# Altium PCB thesis.PcbDoc
Units mil, origin at the board's own origin, x right, y up, seen from the top; angles counter-clockwise.
Board outline 3149.61 x 3149.61 mil, 2 copper layers (Top Layer, Bottom Layer); 73 components, 69 nets, 268 pads, 192 vias.
Unrouted connection lines stored in the file: 133.
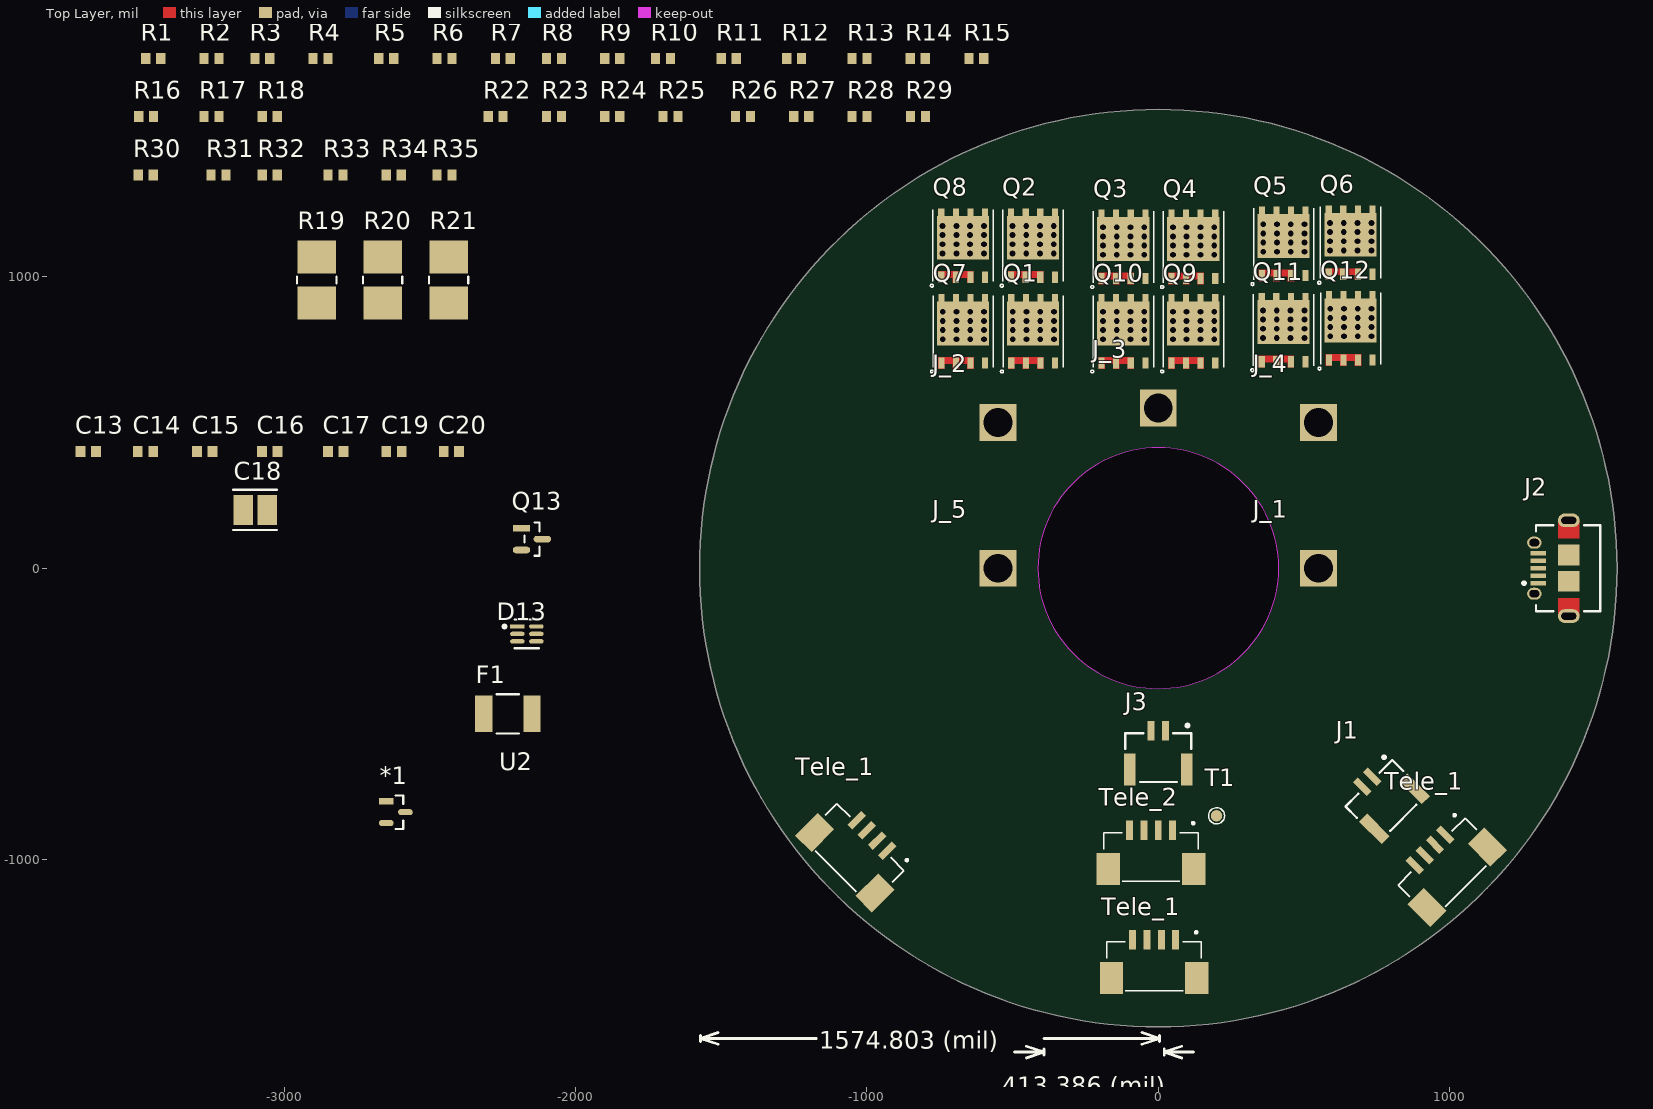
[diagram p0: Top Layer view]
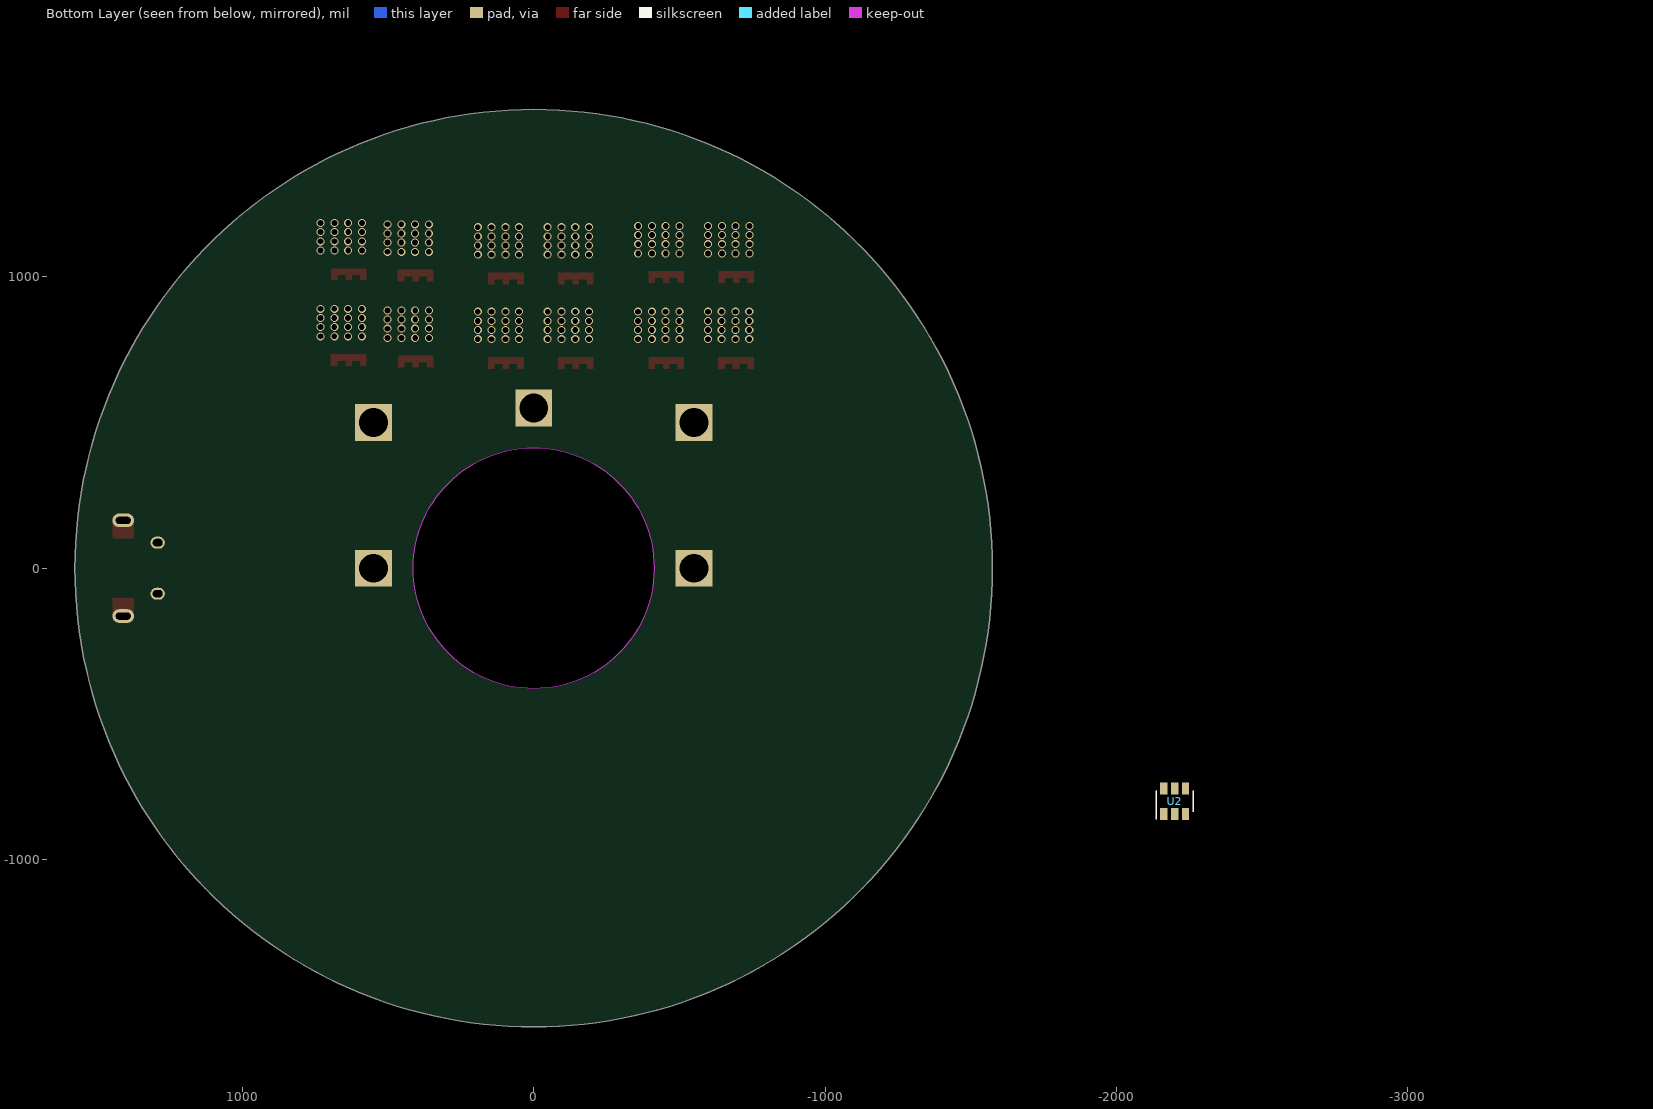
[diagram p1: Bottom Layer view, seen from below]

## Layer stack, top to bottom
Top Solder: solder mask 0.4, Solder Resist, Dk 3.5
Top Layer: signal copper 1.4
Dielectric 1: dielectric 12.6, FR-4, Dk 4.8
Bottom Layer: signal copper 1.4
Bottom Solder: solder mask 0.4, Solder Resist, Dk 3.5

## Board outline
-1574.8,0 ccw(c0,0) 0,-1574.8 ccw(c0,0) 1574.8,0 ccw(c0,0) 0,1574.8 ccw(c0,0)
cut-out: -413.39,0 ccw(c0,0) 0,-413.39 ccw(c0,0) 413.39,0 ccw(c0,0) 0,413.39 ccw(c0,0)

## Design rules (kind name [scope] priority, off if disabled: settings)
Clearance [All] p1: gap=10 ignorepadtopadclearanceinfootprint=FALSE except(0: Arc-Hole Track-Hole SMDPad-Hole THPad-Hole Via-Hole Fill-Hole Poly-Hole Region-Hole Text-Hole)
PolygonConnect [All] p1: connectstyle=Relief reliefconductorwidth=10 reliefentries=4 polygonreliefangle="90 Angle" airgapwidth=10
RoutingVias [All] p1: holewidth=28 width=50 viastyle="Through Hole" minholewidth=28 minwidth=50 maxholewidth=28 maxwidth=50
SolderMaskExpansion [All] p1: expansion=4 istentingtop=FALSE
Width [All] p1: maxlimit=10 minlimit=10 preferedwidth=10
30 further rules are at their usual default settings.

## Components (designator, comment, footprint, x,y, rotation, side; value= is the part's Value field where it differs from the comment)
*1 "TMP235AEDBZRQ1_1" TMP235AEDBZRQ1 -2617.11,-837.4 r0 top
C13 "Cap_0603" CAP_0603 -3673.43,400 r180 top
C14 "Cap_0603" CAP_0603 -3476.57,400 r180 top
C15 "Cap_0603" CAP_0603 -3273.43,400 r180 top
C16 "Cap_0603" CAP_0603 -3050,400 r180 top
C17 "Cap_0603" CAP_0603 -2823.43,400 r180 top
C18 "100n" Cap_1210 -3100,200 r0 top
C19 "Cap_0603" CAP_0603 -2623.43,400 r180 top
C20 "Cap_0603" CAP_0603 -2426.57,400 r180 top
D13 "BAV99S,115" BAV99S -2167.45,-225.59 r0 top
F1 "Polyfuse" Polyfuse -2232.68,-500 r0 top value=0.4-6.5Ω
J1 "JST-GH-2" JST-GH-2 782.12,-797.33 r45 top
J2 "USB_micro" USB_micro 1350,0 r90 top
J3 "JST-GH-2" JST-GH-2 0,-650 r0 top
J_1 "Connector" Conn_01x01 550,0 r0 top
J_2 "Connector" Conn_01x01 -550,500 r0 top
J_3 "Connector" Conn_01x01 0,550 r0 top
J_4 "Connector" Conn_01x01 550,500 r0 top
J_5 "Connector" Conn_01x01 -550,0 r0 top
Q1 "BSC021N08NS5ATMA1" BSC021N08NS5ATMA1 -429.5,815.48 r0 top
Q2 "BSC021N08NS5ATMA1" BSC021N08NS5ATMA1 -430,1110 r0 top
Q3 "BSC021N08NS5ATMA1" BSC021N08NS5ATMA1 -119.5,1105.48 r0 top
Q4 "BSC021N08NS5ATMA1" BSC021N08NS5ATMA1 120.5,1105.48 r0 top
Q5 "BSC021N08NS5ATMA1" BSC021N08NS5ATMA1 430.5,1115.48 r0 top
Q6 "BSC021N08NS5ATMA1" BSC021N08NS5ATMA1 660,1120 r0 top
Q7 "BSC021N08NS5ATMA1" BSC021N08NS5ATMA1 -669.5,815.48 r0 top
Q8 "BSC021N08NS5ATMA1" BSC021N08NS5ATMA1 -670,1110 r0 top
Q9 "BSC021N08NS5ATMA1" BSC021N08NS5ATMA1 120.5,815.48 r0 top
Q10 "BSC021N08NS5ATMA1" BSC021N08NS5ATMA1 -119.5,815.48 r0 top
Q11 "BSC021N08NS5ATMA1" BSC021N08NS5ATMA1 430,820 r0 top
Q12 "BSC021N08NS5ATMA1" BSC021N08NS5ATMA1 660.5,825.48 r0 top
Q13 "BSS138" BSS138 -2150,100 r0 top
R1 "RES_0603" Res_0603 -3450,1750 r0 top
R2 "RES_0603" Res_0603 -3250,1750 r0 top
R3 "RES_0603" Res_0603 -3075.59,1750 r0 top
R4 "RES_0603" Res_0603 -2875.59,1750 r0 top
R5 "RES_0603" Res_0603 -2650,1750 r0 top
R6 "RES_0603" Res_0603 -2450,1750 r0 top
R7 "RES_0603" Res_0603 -2250,1750 r0 top
R8 "RES_0603" Res_0603 -2074.41,1750 r0 top
R9 "RES_0603" Res_0603 -1874.41,1750 r0 top
R10 "RES_0603" Res_0603 -1700,1750 r180 top
R11 "RES_0603" Res_0603 -1474.41,1750 r0 top
R12 "RES_0603" Res_0603 -1250,1750 r180 top
R13 "RES_0603" Res_0603 -1025.59,1750 r180 top
R14 "RES_0603" Res_0603 -825.59,1750 r180 top
R15 "RES_0603" Res_0603 -624.41,1750 r180 top
R16 "RES_0603" Res_0603 -3474.41,1550 r180 top
R17 "RES_0603" Res_0603 -3250,1550 r180 top
R18 "RES_0603" Res_0603 -3050,1550 r180 top
R19 "WSLP25122L000FEA" Shunt_res -2888.69,989.21 r90 top
R20 "WSLP25122L000FEA" Shunt_res -2662.31,989.21 r90 top
R21 "WSLP25122L000FEA" Shunt_res -2435.94,989.21 r90 top
R22 "RES_0603" Res_0603 -2274.41,1550 r180 top
R23 "RES_0603" Res_0603 -2074.41,1550 r180 top
R24 "RES_0603" Res_0603 -1874.41,1550 r180 top
R25 "1k" Res_0603 -1674.41,1550 r180 top
R26 "RES_0603" Res_0603 -1425.59,1550 r180 top
R27 "RES_0603" Res_0603 -1225.59,1550 r180 top
R28 "RES_0603" Res_0603 -1025.59,1550 r180 top
R29 "RES_0603" Res_0603 -824.41,1550 r180 top
R30 "RES_0603" Res_0603 -3475.59,1350 r180 top
R31 "RES_0603" Res_0603 -3225.59,1350 r0 top
R32 "RES_0603" Res_0603 -3050,1350 r180 top
R33 "RES_0603" Res_0603 -2824.41,1350 r180 top
R34 "RES_0603" Res_0603 -2624.41,1350 r180 top
R35 "RES_0603" Res_0603 -2450,1350 r180 top
T1 "TestPoint" Testpoint 200,-850 r0 top
Tele_1 "JST-GH-4" JST-GH-4 -1025.75,-1122.01 r135 top
Tele_1 "JST-GH-4" JST-GH-4 100,-1450 r180 top
Tele_1 "JST-GH-4" JST-GH-4 1137.22,-1010.55 r225 top
Tele_2 "JST-GH-4" JST-GH-4 89.57,-1075.2 r180 top
U2 "MAX4995A" MAX4995AAUT+T -2200,-800 r0 top

## Footprints (in the part's own frame and the unit in brackets; to place one, negate y for a bottom-side part, rotate by r counter-clockwise, add the part's x,y. Pads: shape width x height; smd on the part's side, far side on the other; paste and mask are expansions set on the pad)
BAV99S [mm]
  rect 1.259x0.382 smd paste+0 mask+0: 1(-0.827,0.65)
  rrect100% 1.259x0.382 smd paste+0 mask+0: 2(-0.827,0) 3(-0.827,-0.65) 4(0.827,-0.65) 5(0.827,0) 6(0.827,0.65)
  silkscreen extent -2.08,-1.25 1.05,1.25, body extent -1.71,-1.25 1.71,1.25, height 0.25
BSC021N08NS5ATMA1 [mil] "Mosfet_esc"
  rect 21x39 smd mask+0: 1(-75,-110.93) 1(-25,-110.93) 1(25,-110.94) 4(75,-110.93)
  rect 21x29 smd mask+0: 8(-75,110.94) 8(-25,110.94) 8(25,110.94) 8(75,110.94)
  rect 179.13x150.64 smd mask+0: 8(-0.5,24.52)
  Top Layer region: 35.5,-91.43 35.5,-130.43 14.5,-130.43 14.5,-113.09 -14.5,-113.09 -14.5,-130.43 -35.5,-130.43 -35.5,-113.09 -64.5,-113.08 -64.5,-130.43 -85.5,-130.43 -85.5,-91.44
  silkscreen extent -112,-145 104,121, body extent -105,-121 105,121, height 39
BSS138 [mm]
  rect 1.524x0.578 smd paste+0 mask+0: 1(-0.91,0.95)
  rrect100% 1.524x0.578 smd paste+0 mask+0: 2(-0.91,-0.95) 3(0.91,0)
  silkscreen extent -0.65,-1.45 0.65,1.45, body extent -1.92,-1.7 1.92,1.7, height 0.25
CAP_0603 [mm]
  rect 0.85x0.95 smd: 1(-0.675,0) 2(0.675,0)
  body extent -0.85,-0.45 0.85,0.45, height 0.9
Cap_1210 [mil]
  rect 67.04x102.61 smd paste+0 mask+0: 1(-41.36,0) 2(41.36,0)
  silkscreen extent -75,-69 75,69, body extent -79,-57 79,57, height 10
Conn_01x01 [mm]
  rect 3.2x3.2 hole 2.5 paste-3.2 mask+0: 1(0,0) 1(0,0)
JST-GH-2 [mm] "FP-BM02B-GHS-TBT_LF_SN-MFG"
  rect 0.6x1.7 smd paste+0 mask+0: 1(0.625,2.325) 2(-0.625,2.325)
  rect 1x2.8 smd paste+0 mask+0: 3(-2.475,-1.025) 4(2.475,-1.025)
  silkscreen extent -2.88,-2.12 2.88,2.92, body extent -3.07,-2.52 3.07,3.28, height 0.25
JST-GH-4 [mm]
  rect 0.6x1.7 smd: 1(1.025,-4.45) 2(2.275,-4.45) 3(3.525,-4.45) 4(4.775,-4.45)
  rect 2.032x2.8 smd: S1(6.625,-1.1) S2(-0.825,-1.1)
  silkscreen extent -1.23,-5.18 7.02,0, body extent -1.24,-4.67 7.01,0.23, height 4.06
MAX4995AAUT+T [mm]
  rect 0.65x1.06 smd far side mask+0: 1(0.95,-1.1) 2(0,-1.1) 3(-0.95,-1.1) 4(-0.95,1.1) 5(0,1.1) 6(0.95,1.1)
  body extent -1.5,-1.5 1.5,1.5, height 1.45
Polyfuse [mm]
  rect 1.5x3.2 smd paste+0 mask+0: 1(-2.1,0) 2(2.1,0)
  silkscreen extent -0.97,-1.71 0.97,1.71, body extent -2.95,-1.81 2.95,1.81, height 0.25
Res_0603 [mm]
  rect 0.8x0.95 smd: 1(-0.65,0) 2(0.65,0)
  body extent -0.82,-0.48 0.82,0.48, height 0.5
Shunt_res [mil]
  rect 113.07x131.45 smd paste+0 mask+0: 1(-79.47,0) 2(79.47,0)
  silkscreen extent -11,-68 11,68, body extent -140,-72 140,72, height 10
Testpoint [mm]
  round 1 smd paste-1 mask+0: 1(0,0)
  silkscreen extent -0.7,-0.7 0.7,0.7
TMP235AEDBZRQ1 [mm]
  rect 1.274x0.532 smd paste+0 mask+0: 1(-0.835,0.95)
  rrect100% 1.274x0.532 smd paste+0 mask+0: 2(-0.835,-0.95) 3(0.835,0)
  silkscreen extent 0,-1.46 0.65,1.46, body extent -1.57,-1.56 1.57,1.56, height 0.25
USB_micro [mm] "SMD, 5-Leads, Body 7.5x5.6mm, Pitch 0.65mm"
  rect 0.4x1.35 smd: 1(-1.3,1.175) 2(-0.65,1.175) 3(0,1.175) 4(0.65,1.175) 5(1.3,1.175)
  oval 1.05x1.25 hole 0.65 slot 0.85 at 90 deg: 6(-2.225,1.5) 7(2.225,1.5)
  oval 1.2x1.9 hole 0.6 slot 1.3 at 90 deg: 8(-4.175,-1.5) 11(4.175,-1.5)
  rect 1.8x1.9 smd: 9(-1.15,-1.5) 10(1.15,-1.5)
  Top Layer region: -2.6,-0.55 -4.175,-0.55 -4.175,-2.45 -2.6,-2.45
  Top Layer region: 2.6,-2.45 4.175,-2.45 4.175,-0.55 2.6,-0.55
  silkscreen extent -3.75,-4.25 3.75,2.52, body extent -4.32,-4.25 4.32,1.64, height 2.74

## Part data
C13 C14 C15 C16 C17 C19 C20: "Chip Capacitor"
C18: library part Cap_1210, "Capacitor"
D13: library part BAV99S, "DIODE ARRAY GP 100V 200MA 6TSSOP", RoHS Compliant=Yes
F1: "PTC RESET FUSE 60V 140MA 1812", Ambient Temperature Range High=+85°C, Ambient Temperature Range Low=-40°C, Current Rating=40A, Hold Current=0.14A, Manufacturer=Bourns, Manufacturer Part Number=MF-MSMF014-2, Package=MF-MSMF-1, Resistance=0.4-6.5Ω, Temperature="-40°C to +85°C", Trip Current=0.34A, Voltage Rating=60V, Automotive=Yes, Automotive Grade="Grade 3", Category=Fuse, ComponentLink2Description=Datasheet, ComponentLink2URL=https://www.bourns.com/pdfs/mfmsmf.pdf, Device Class L1="Circuit Protection", Device Class L2="PTC Resettable Fuses", Device Class L3=unset, Digikey Description="PTC RESET FUSE 60V 140MA 1812", Height=1.1mm, Lead Free=Yes, Mouser Description="Resettable Fuses - PPTC 0.14A 60V 0.40ohm", Octopart=https://octopart.com/mf-msmf014-2-bourns-70906, RoHS=TRUE, Temperature Range High=+85°C, Temperature Range Low=-40°C, Trip Time=0.15s
J1 J3: "BM02B-GHS-TBT(LF)(SN)(N)", Color=Natural, Connector Type="Outer Shroud Contact", Contact Plating=Tin, Fastening Type=Ramp, Lead Free="Lead Free", Mount="Surface Mount", Number of Positions=2, Number of Rows=1, Packaging="Tape and Reel", Pitch=0.049inch, Termination=Solder
J2: "Right Angle Female Type AB Micro USB Connector, 30 V, 1.8 A, -30 to 85 degC, RoHS, Tape and Reel", Color=Black, Current Rating=1.8A, Manufacturer=Molex, Operating Temperature Range=-20Cto+85C, Package Description="Micro USB Connector, Pitch 0.65 mm, 5 Positions, Body 7.5 x 5.6 mm", Package Reference=47589-0001, Voltage Rating=30VAC, Brand=Molex, Connector Type=MicroUSBTypeABreceptacle, Contact Material=CopperAlloy, Contact Plating=Gold, Datasheet URL=http://www.molex.com/webdocs/datasheets/pdf/en-us/0475890001_IO_CONNECTORS.pdf, Datasheet Version=12/2016, Gender=Female, Manufacturer URL=http://www.molex.com/, Mounting Angle=Right, Mounting Technology=SurfaceMount, Number of Contacts=5Contact, Number of Ports=1Port, Package URL=http://www.molex.com/pdm_docs/sd/475890001_sd.pdf, Packaging=Reel, Product=MicroUSBTypeABConnectors, Product Category=USBConnectors, RoHS=True, Series=47589, Standard=USB, Termination Style=SMD/SMT
J_1 J_2 J_3 J_4 J_5: library part Conn_01x01, "Connector 01x01"
Q1 Q2 Q3 Q4 Q5 Q6 Q7 Q8 Q9 Q10 Q11 Q12: "N-Channel 80V 100A (Tc) 214W (Tc) Surface Mount PG-TSON-8-3", Package="TSON-8 Infineon Technologies", Availability=Warning, Check_prices=https://www.snapeda.com/parts/BSC021N08NS5ATMA1/Infineon%20Technologies/view-part/3623694/?ref=eda, MF="Infineon Technologies", MP=BSC021N08NS5ATMA1, Price=None, SnapEDA_Link=https://www.snapeda.com/parts/BSC021N08NS5ATMA1/Infineon%20Technologies/view-part/3623694/?ref=snap
Q13: "MOSFET N-CH 50V 220MA SOT-23"
R1 R2 R3 R4 R5 R6 R7 R8 R9 R10 R11 R12 R13 R14 R15 R16 R17 R18 R22 R23 R24 R26 R27 R28 R29 R30 R31 R32 R33 R34 R35: "Chip Resistor"
R19 R20 R21: library part Shunt_res, "RES 0.002 OHM 1% 3W 2512"
R25: library part RES_0603, "Chip Resistor", Manufacturer="Vishay Semiconductor", Max Operating Temperature="155 degC", Min Operating Temperature="-55 degC", Package Quantity=5000, Voltage Rating="75 V", ComponentLink1Description="Manufacturer URL", ComponentLink1URL=http://www.vishay.com/, ComponentLink2Description=Datasheet, ComponentLink2URL=http://www.vishay.com/docs/20035/dcrcwe3.pdf, DatasheetVersion=06/2012, Height="0.45 mm", Length="1.55 mm", Mount="Surface Mount", Mounting Technology="Surface Mount", PackageDescription="2-Pin Surface Mount Device, Body 1.575 x 0.85 mm", PackageReference=0603, Packaging="Tape and Reel", Pins=2, REACH SVHC=Unknown, RoHSCompliant=true
T1: "Testpoint"
Tele_1 Tele_1 Tele_1 Tele_2: "JST-BM04B-GHS", Package=None, Digi-Key_Part_Number=455-1580-1-ND, Digi-Key_Purchase_URL=https://www.digikey.com/product-detail/en/jst-sales-america-inc/BM04B-GHS-TBT_LF__SN__N_/455-1580-1-ND/807848?utm_source=snapeda&utm_medium=aggregator&utm_campaign=symbol, MF="JST Sales", MP=BM04B-GHS-TBT_LF__SN__N_, SnapEDA_Link=https://www.snapeda.com/parts/BM04B-GHS-TBT%28LF%29%28SN%29%28N%29/JST%20Sales%20America%20Inc./view-part/841999/?ref=snap

## Via types
v1: diameter 27.56, hole 20, Top Layer to Bottom Layer, tented both sides, 192 vias

## Nets (pads, with @x,y where several pads share a name; then routed paths per layer and width w, separated by ;. In a path a pad name is that pad's centre, name@x,y a point inside that pad or via, vN(x,y) a via of type N, cw(c..) or ccw(c..) an arc to the next point about the centre after c; other vN are vias at no path point)
+5: *1.1 C13.1 C14.2 C18.2 C20.2 D13.2 D13.5 F1.2 J3.1 R24.1 R25.2 Tele_1.1@984.8,-915.2 U2.5
GND: *1.3 C13.2 C14.1 C15.1 C16.1 C17.1 C18.1 C19.1 C20.1 D13.1 D13.4 J1.2 J1.3 J1.4 J2.5 J2.6 J2.7 J2.8 J2.9 J2.10 J2.11 J3.2 J3.3 J3.4 J_5.1 Q13.2 R19.1 R20.1 R21.1 R27.1 R34.2 Tele_1.4 Tele_1.S1 Tele_1.S2 Tele_2.4 Tele_2.S1 Tele_2.S2 U2.2
Net*1_2: *1.2 R35.1
NetC15_2: C15.2 C16.2 C17.2 T1.1 Tele_2.1 U2.1
NetC19_2: C19.2 R35.2
NetD1_1: R1.1 R4.2 R7.1
NetD1_2: J_2.1 Q1.1 Q2.1 Q7.8 Q8.8 R4.1
  other v1: -739.81,786.1 -692.57,786.1 -645.33,786.1 -598.08,786.1 -739.81,817.6 -692.57,817.6 -645.33,817.6 -598.08,817.6 -739.81,849.09 -692.57,849.09 -645.33,849.09 -598.08,849.09 -739.81,880.59 -692.57,880.59 -645.33,880.59 -598.08,880.59 -740.31,1080.62 -693.07,1080.62 -645.83,1080.62 -598.58,1080.62 -740.31,1112.12 -693.07,1112.12 -645.83,1112.12 -598.58,1112.12 -740.31,1143.61 -693.07,1143.61 -645.83,1143.61 -598.58,1143.61 -740.31,1175.11 -693.07,1175.11 -645.83,1175.11 -598.58,1175.11
NetD2_1: R2.1 R5.2 R8.1
NetD2_2: J_3.1 Q3.1 Q4.1 Q9.8 Q10.8 R5.1
  other v1: -189.82,786.1 -142.57,786.1 -95.33,786.1 -48.08,786.1 50.19,786.1 97.43,786.1 144.67,786.1 191.92,786.1 -189.82,817.6 -142.57,817.6 -95.33,817.6 -48.08,817.6 50.19,817.6 97.43,817.6 144.67,817.6 191.92,817.6 -189.82,849.09 -142.57,849.09 -95.33,849.09 -48.08,849.09 50.19,849.09 97.43,849.09 144.67,849.09 191.92,849.09 -189.82,880.59 -142.57,880.59 -95.33,880.59 -48.08,880.59 50.19,880.59 97.43,880.59 144.67,880.59 191.92,880.59
NetD3_1: R3.1 R6.2 R9.1
NetD3_2: J_4.1 Q5.1 Q6.1 Q11.8 Q12.8 R6.1
  other v1: 359.69,790.62 406.93,790.62 454.17,790.62 501.42,790.62 590.19,796.1 637.43,796.1 684.67,796.1 731.92,796.1 359.69,822.12 406.93,822.12 454.17,822.12 501.42,822.12 590.19,827.6 637.43,827.6 684.67,827.6 731.92,827.6 359.69,853.61 406.93,853.61 454.17,853.61 501.42,853.61 590.19,859.09 637.43,859.09 684.67,859.09 731.92,859.09 359.69,885.11 406.93,885.11 454.17,885.11 501.42,885.11 590.19,890.59 637.43,890.59 684.67,890.59 731.92,890.59
NetD7_1: R10.1 R13.2 R16.1
NetD7_2: Q7.1 Q8.1 R13.1 R19.2
NetD8_1: R11.1 R14.2 R17.1
NetD8_2: Q9.1 Q10.1 R14.1 R20.2
NetD9_1: R12.1 R15.2 R18.1
NetD9_2: Q11.1 Q12.1 R15.1 R21.2
NetD10_1: R23.2 Tele_1.3@915.2,-984.8
NetD11_1: R22.2 Tele_1.2@950,-950
NetD12_2: Q13.3 R24.2
NetD13_3: D13.3 R28.2 Tele_1.2@10.43,-1274.8
NetD13_6: D13.6 R29.2 Tele_1.3@-38.78,-1274.8
NetD14_1: R30.2
NetD15_1: 
NetD16_1: 
NetD16_2: 
NetD16_3: 
NetD17_2: 
NetD18_2: J2.1 R31.2
NetD19_2: J2.3 R33.2
NetD19_3: J2.2 R32.2
NetF1_1: F1.1 Tele_1.1@59.65,-1274.8
NetJ1_1: J1.1 R28.1
NetQ1_4: Q1.4 R7.2
NetQ2_4: Q2.4 R1.2
NetQ3_4: Q3.4 R8.2
NetQ4_4: Q4.4 R2.2
NetQ5_4: Q5.4 R9.2
NetQ6_4: Q6.4 R3.2
NetQ7_4: Q7.4 R16.2
NetQ8_4: Q8.4 R10.2
NetQ9_4: Q9.4 R17.2
NetQ10_4: Q10.4 R11.2
NetQ11_4: Q11.4 R18.2
NetQ12_4: Q12.4 R12.2
NetQ13_1: Q13.1 R26.2
NetR22_1: R22.1
NetR23_1: R23.1
NetR25_1: R25.1
NetR26_1: R26.1 U2.6
NetR27_2: R27.2 U2.3
NetR29_1: R29.1
NetR30_1: R30.1
NetR31_1: R31.1
NetR32_1: R32.1
NetR33_1: R33.1
NetR34_1: R34.1
NetTele_1_2: Tele_1.2@-965.2,-934.8 Tele_2.2
NetTele_1_3: Tele_1.3@-1000,-900 Tele_2.3
NetU1_1: 
NetU1_4: 
NetU2_4: U2.4
NetU4_18: 
NetU4_36: 
NetU4_37: 
NetU4_40: 
NetU4_41: 
NetU4_42: 
VDC: J_1.1 Q1.8 Q2.8 Q3.8 Q4.8 Q5.8 Q6.8
  other v1: -499.82,786.1 -452.57,786.1 -405.33,786.1 -358.08,786.1 -499.82,817.6 -452.57,817.6 -405.33,817.6 -358.08,817.6 -499.82,849.09 -452.57,849.09 -405.33,849.09 -358.08,849.09 -499.82,880.59 -452.57,880.59 -405.33,880.59 -358.08,880.59 -189.82,1076.1 -142.57,1076.1 -95.33,1076.1 -48.08,1076.1 50.19,1076.1 97.43,1076.1 144.67,1076.1 191.92,1076.1 -500.31,1080.62 -453.07,1080.62 -405.83,1080.62 -358.58,1080.62 360.18,1086.1 407.43,1086.1 454.67,1086.1 501.92,1086.1 589.69,1090.62 636.93,1090.62 684.17,1090.62 731.42,1090.62 -189.82,1107.6 -142.57,1107.6 -95.33,1107.6 -48.08,1107.6 50.19,1107.6 97.43,1107.6 144.67,1107.6 191.92,1107.6 -500.31,1112.12 -453.07,1112.12 -405.83,1112.12 -358.58,1112.12 360.18,1117.6 407.43,1117.6 454.67,1117.6 501.92,1117.6 589.69,1122.12 636.93,1122.12 684.17,1122.12 731.42,1122.12 -189.82,1139.09 -142.57,1139.09 -95.33,1139.09 -48.08,1139.09 50.19,1139.09 97.43,1139.09 144.67,1139.09 191.92,1139.09 -500.31,1143.61 -453.07,1143.61 -405.83,1143.61 -358.58,1143.61 360.18,1149.09 407.43,1149.09 454.67,1149.09 501.92,1149.09 589.69,1153.61 636.93,1153.61 684.17,1153.61 731.42,1153.61 -189.82,1170.59 -142.57,1170.59 -95.33,1170.59 -48.08,1170.59 50.19,1170.59 97.43,1170.59 144.67,1170.59 191.92,1170.59 -500.31,1175.11 -453.07,1175.11 -405.83,1175.11 -358.58,1175.11 360.18,1180.59 407.43,1180.59 454.67,1180.59 501.92,1180.59 589.69,1185.11 636.93,1185.11 684.17,1185.11 731.42,1185.11
pads on no net: J2.4 Tele_1.1@-930.4,-969.6

## Silkscreen, mask and mechanical layers (free items; w line width, h text height)
Top Overlay:
  lines w10: -1570.71,-1624.17 -1570.71,-1604.17 ; -1510.71,-1634.17 -1570.71,-1614.17 ; -1510.71,-1594.17 -1570.71,-1614.17 ; -1174.19,-1614.17 -1570.71,-1614.17 ; -492.84,-1661.06 -392.84,-1661.06 ; -452.84,-1681.06 -392.84,-1661.06 ; -452.84,-1641.06 -392.84,-1661.06 ; -392.84,-1671.06 -392.84,-1651.06 ; -392.43,-1614.17 4.09,-1614.17 ; -55.91,-1634.17 4.09,-1614.17 ; -55.91,-1594.17 4.09,-1614.17 ; 4.09,-1624.17 4.09,-1604.17 ; 20.55,-1671.06 20.55,-1651.06 ; 80.55,-1681.06 20.55,-1661.06 ; 80.55,-1641.06 20.55,-1661.06 ; 120.55,-1661.06 20.55,-1661.06
  text "1574.803 (mil)" at -1164.19,-1650.16 h60
  text "413.386 (mil)" at -537.04,-1805.02 h60
Mechanical 1:
  circle w19.68: c0,0 r413.39
  circle w19.68: c0,0 r1574.8

## Text inside footprints (layer, text, board x,y; h text height)
Q1: Top Assembly "Copyright 2021 Accelerated Designs. All rights reserved." at -427.59,779.09 h5 r90; Mechanical 6 "*" at -424.9,808.2 h39.37 r90
Q2: Top Assembly "Copyright 2021 Accelerated Designs. All rights reserved." at -428.08,1073.61 h5 r90; Mechanical 6 "*" at -425.4,1102.71 h39.37 r90
Q3: Top Assembly "Copyright 2021 Accelerated Designs. All rights reserved." at -117.59,1069.1 h5 r90; Mechanical 6 "*" at -114.9,1098.2 h39.37 r90
Q4: Top Assembly "Copyright 2021 Accelerated Designs. All rights reserved." at 122.41,1069.1 h5 r90; Mechanical 6 "*" at 125.1,1098.2 h39.37 r90
Q5: Top Assembly "Copyright 2021 Accelerated Designs. All rights reserved." at 432.41,1079.1 h5 r90; Mechanical 6 "*" at 435.1,1108.2 h39.37 r90
Q6: Top Assembly "Copyright 2021 Accelerated Designs. All rights reserved." at 661.92,1083.61 h5 r90; Mechanical 6 "*" at 664.6,1112.71 h39.37 r90
Q7: Top Assembly "Copyright 2021 Accelerated Designs. All rights reserved." at -667.59,779.09 h5 r90; Mechanical 6 "*" at -664.9,808.2 h39.37 r90
Q8: Top Assembly "Copyright 2021 Accelerated Designs. All rights reserved." at -668.08,1073.61 h5 r90; Mechanical 6 "*" at -665.4,1102.71 h39.37 r90
Q9: Top Assembly "Copyright 2021 Accelerated Designs. All rights reserved." at 122.41,779.09 h5 r90; Mechanical 6 "*" at 125.1,808.2 h39.37 r90
Q10: Top Assembly "Copyright 2021 Accelerated Designs. All rights reserved." at -117.59,779.09 h5 r90; Mechanical 6 "*" at -114.9,808.2 h39.37 r90
Q11: Top Assembly "Copyright 2021 Accelerated Designs. All rights reserved." at 431.92,783.61 h5 r90; Mechanical 6 "*" at 434.6,812.71 h39.37 r90
Q12: Top Assembly "Copyright 2021 Accelerated Designs. All rights reserved." at 662.41,789.09 h5 r90; Mechanical 6 "*" at 665.1,818.2 h39.37 r90
U2: Mechanical 5 "U4" at -2194.49,-805.58 h19.68